# EAGLE board Atomic_V1.0__P-CAD-ASCII.PCB_DipTrace-Export (EAGLE 7.5.0)
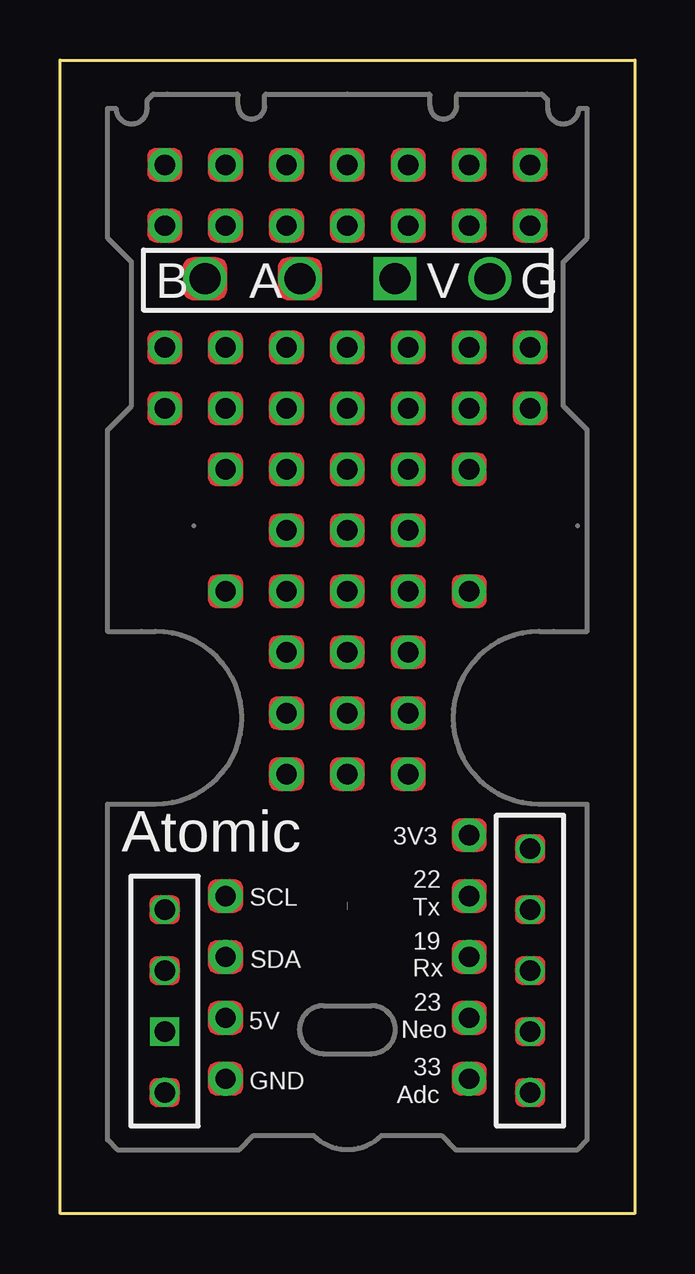
[diagram p0: board, top side]
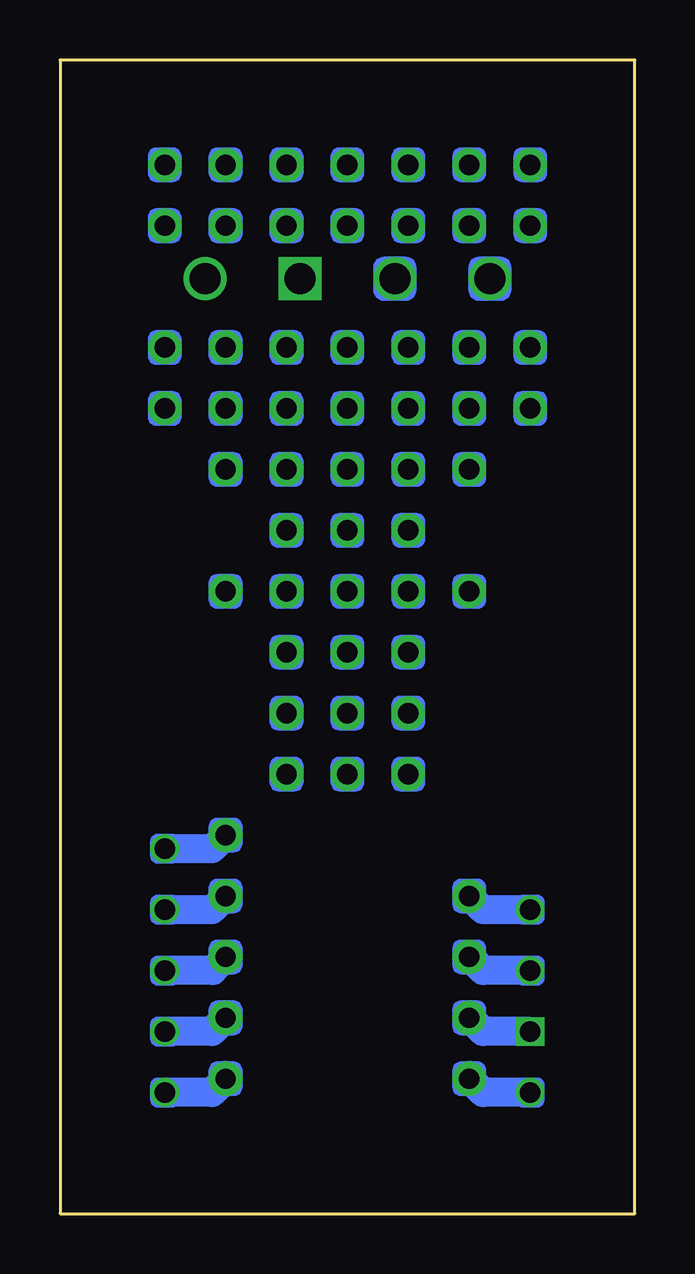
[diagram p1: board, bottom side, seen from below]

Size 23.97 x 48.08 mm. Coordinates in mm from the lower left corner, seen from the top.
Outline: 0,48.08 23.97,48.08 23.97,0 0,0 0,48.08
Copper layers (1*16): TOP 0.035mm / dielectric 1.5mm / Bottom 0.035mm
Design rules "default *": minimum track width 10mil, minimum drill 0.61mm, track to track 8mil, track to pad 8mil, pad to pad 8mil, via to via 8mil, smd to smd 8mil, copper to edge 40mil, drill to drill 8mil, minimum pad ring 0mil, minimum via ring 8mil, stop-mask expansion 2mil, vias tented up to drill 19mil, thermal gap 10mil
Net classes: 0 Default: width 0.33 mm, clearance 0.33 mm

## Footprints (pad centres in the part's own frame; a part is rotated, then mirrored left to right if it is on the bottom)
FreePad = drill 4.2 pad 4.2: 1 0,0
FreePad_FreePad1 = drill 0.85 pad 1.4: 1 0,0
FreePad_FreePad10 = drill 2 pad 2: 1 0,0
FreePad_FreePad11 = drill 0.85 pad 1.2: 1 0,0
FreePad_FreePad18 = drill 0.85 pad 1.2 square: 1 0,0
FreePad_FreePad66 = drill 1.3 pad 1.8: 1 0,0
FreePad_FreePad67 = drill 1.3 pad 1.8: 1 0,0
FreePad_FreePad69 = drill 1.3 pad 1.8 square: 1 0,0
FreePad_FreePad74 = drill 0: 1 0,0

## Placement (x,y rotation side)
FreePad0  FREEPAD  [FreePad]  11.99,12.67 0 top
FreePad1  FREEPAD  [FreePad_FreePad1]  6.91,5.62 180 top
FreePad2  FREEPAD  [FreePad_FreePad1]  17.07,5.62 180 top
FreePad3  FREEPAD  [FreePad_FreePad1]  6.91,8.16 180 top
FreePad4  FREEPAD  [FreePad_FreePad1]  17.07,8.16 180 top
FreePad5  FREEPAD  [FreePad_FreePad1]  6.91,10.7 180 top
FreePad6  FREEPAD  [FreePad_FreePad1]  17.07,10.7 180 top
FreePad7  FREEPAD  [FreePad_FreePad1]  6.91,13.24 180 top
FreePad8  FREEPAD  [FreePad_FreePad1]  17.07,13.24 180 top
FreePad9  FREEPAD  [FreePad_FreePad1]  17.07,15.78 180 top
FreePad10  FREEPAD  [FreePad_FreePad10]  11.99,4.67 0 top
FreePad11  FREEPAD  [FreePad_FreePad11]  4.37,12.67 180 top
FreePad12  FREEPAD  [FreePad_FreePad11]  4.37,10.13 180 top
FreePad13  FREEPAD  [FreePad_FreePad11]  19.61,5.05 0 top
FreePad14  FREEPAD  [FreePad_FreePad11]  19.61,7.59 0 top
FreePad15  FREEPAD  [FreePad_FreePad11]  19.61,10.13 0 top
FreePad16  FREEPAD  [FreePad_FreePad11]  19.61,12.67 0 top
FreePad17  FREEPAD  [FreePad_FreePad11]  19.61,15.21 0 top
FreePad18  FREEPAD  [FreePad_FreePad18]  4.37,7.59 180 top
FreePad19  FREEPAD  [FreePad_FreePad11]  4.37,5.05 180 top
FreePad20  FREEPAD  [FreePad_FreePad1]  9.45,23.4 180 top
FreePad21  FREEPAD  [FreePad_FreePad1]  9.45,20.86 180 top
FreePad22  FREEPAD  [FreePad_FreePad1]  9.45,18.32 0 top
FreePad23  FREEPAD  [FreePad_FreePad1]  6.91,41.18 0 top
FreePad24  FREEPAD  [FreePad_FreePad1]  4.37,41.18 0 top
FreePad25  FREEPAD  [FreePad_FreePad1]  11.99,18.32 180 top
FreePad26  FREEPAD  [FreePad_FreePad1]  11.99,41.18 0 top
FreePad27  FREEPAD  [FreePad_FreePad1]  9.45,41.18 0 top
FreePad28  FREEPAD  [FreePad_FreePad1]  11.99,36.1 0 top
FreePad29  FREEPAD  [FreePad_FreePad1]  9.45,36.1 0 top
FreePad30  FREEPAD  [FreePad_FreePad1]  6.91,36.1 0 top
FreePad31  FREEPAD  [FreePad_FreePad1]  4.37,36.1 0 top
FreePad32  FREEPAD  [FreePad_FreePad1]  11.99,33.56 0 top
FreePad33  FREEPAD  [FreePad_FreePad1]  9.45,33.56 0 top
FreePad34  FREEPAD  [FreePad_FreePad1]  6.91,33.56 0 top
FreePad35  FREEPAD  [FreePad_FreePad1]  4.37,33.56 0 top
FreePad36  FREEPAD  [FreePad_FreePad1]  11.99,31.02 0 top
FreePad37  FREEPAD  [FreePad_FreePad1]  9.45,31.02 0 top
FreePad38  FREEPAD  [FreePad_FreePad1]  11.99,28.48 0 top
FreePad39  FREEPAD  [FreePad_FreePad1]  9.45,28.48 0 top
FreePad40  FREEPAD  [FreePad_FreePad1]  11.99,25.94 0 top
FreePad41  FREEPAD  [FreePad_FreePad1]  9.45,25.94 0 top
FreePad42  FREEPAD  [FreePad_FreePad1]  11.99,20.86 0 top
FreePad43  FREEPAD  [FreePad_FreePad1]  11.99,23.4 0 top
FreePad44  FREEPAD  [FreePad_FreePad1]  9.45,43.72 0 top
FreePad45  FREEPAD  [FreePad_FreePad1]  11.99,43.72 0 top
FreePad46  FREEPAD  [FreePad_FreePad1]  4.37,43.72 0 top
FreePad47  FREEPAD  [FreePad_FreePad1]  6.91,43.72 0 top
FreePad48  FREEPAD  [FreePad_FreePad1]  14.53,25.94 180 top
FreePad49  FREEPAD  [FreePad_FreePad1]  14.53,28.48 180 top
FreePad50  FREEPAD  [FreePad_FreePad1]  14.53,31.02 180 top
FreePad51  FREEPAD  [FreePad_FreePad1]  19.61,33.56 180 top
FreePad52  FREEPAD  [FreePad_FreePad1]  17.07,33.56 180 top
FreePad53  FREEPAD  [FreePad_FreePad1]  14.53,33.56 180 top
FreePad54  FREEPAD  [FreePad_FreePad1]  19.61,36.1 180 top
FreePad55  FREEPAD  [FreePad_FreePad1]  17.07,36.1 180 top
FreePad56  FREEPAD  [FreePad_FreePad1]  14.53,36.1 180 top
FreePad57  FREEPAD  [FreePad_FreePad1]  14.53,41.18 180 top
FreePad58  FREEPAD  [FreePad_FreePad1]  19.61,41.18 180 top
FreePad59  FREEPAD  [FreePad_FreePad1]  17.07,41.18 180 top
FreePad60  FREEPAD  [FreePad_FreePad1]  14.53,18.32 180 top
FreePad61  FREEPAD  [FreePad_FreePad1]  14.53,20.86 0 top
FreePad62  FREEPAD  [FreePad_FreePad1]  14.53,23.4 0 top
FreePad63  FREEPAD  [FreePad_FreePad1]  17.07,43.72 180 top
FreePad64  FREEPAD  [FreePad_FreePad1]  19.61,43.72 180 top
FreePad65  FREEPAD  [FreePad_FreePad1]  14.53,43.72 180 top
FreePad66  FREEPAD  [FreePad_FreePad66]  17.93,38.97 270 top
FreePad67  FREEPAD  [FreePad_FreePad67]  6.05,38.97 270 top
FreePad68  FREEPAD  [FreePad_FreePad67]  10.01,38.97 270 top
FreePad69  FREEPAD  [FreePad_FreePad69]  13.97,38.97 270 top
FreePad70  FREEPAD  [FreePad_FreePad1]  6.91,31.02 0 top
FreePad71  FREEPAD  [FreePad_FreePad1]  17.07,31.02 0 top
FreePad72  FREEPAD  [FreePad_FreePad1]  6.91,25.94 0 top
FreePad73  FREEPAD  [FreePad_FreePad1]  17.07,25.94 180 top
FreePad74  FREEPAD  [FreePad_FreePad74]  11.99,4.67 0 top
FreePad75  FREEPAD  [FreePad_FreePad74]  11.99,4.67 180 top

## Library data of the parts
FreePad0 FreePad1-FreePad75 = common

## Tracks (layer width: path | path; a pad name or v marks a point on that pad's centre or on a via)
N$1
  Bottom 1.2: 17.07,15.78 17.64,15.21
N$2
  Bottom 1.2: 17.64,15.21 19.61,15.21
N$3
  Bottom 1.2: 17.07,13.24 17.64,12.67
N$4
  Bottom 1.2: 17.64,12.67 19.61,12.67
N$5
  Bottom 1.2: 17.07,10.67 17.61,10.13
N$6
  Bottom 1.2: 17.61,10.13 19.61,10.13
N$7
  Bottom 1.2: 17.07,8.16 17.64,7.59
N$8
  Bottom 1.2: 17.64,7.59 19.61,7.59
N$9
  Bottom 1.2: 17.07,5.62 17.64,5.05
N$10
  Bottom 1.2: 17.64,5.05 19.61,5.05
N$11
  Bottom 1.2: 6.34,12.67 6.91,13.24
N$12
  Bottom 1.2: 4.37,12.67 6.34,12.67
N$13
  Bottom 1.2: 6.34,10.13 6.91,10.7
N$14
  Bottom 1.2: 4.37,10.13 6.34,10.13
N$15
  Bottom 1.2: 6.34,7.59 6.91,8.16
N$16
  Bottom 1.2: 4.37,7.59 6.34,7.59
N$17
  Bottom 1.2: 6.34,5.05 6.91,5.62
N$18
  Bottom 1.2: 4.37,5.05 6.34,5.05

## Text on the board
tPlace: B | A | V | G | Atomic | 3V3 | SCL | 22 | Tx | 19 | SDA | Rx | 23 | 5V | Neo | GND | 33 | Adc